# Altium PCB base_tiempo.PcbDoc (part 2 of 3)
Units mil, origin at the board's own origin, x right, y up, seen from the top; angles counter-clockwise.
Board outline 9832.52 x 6640 mil, 2 copper layers (Top Layer, Bottom Layer); 185 components, 479 nets, 1064 pads, 206 vias.
Unrouted connection lines stored in the file: 3.
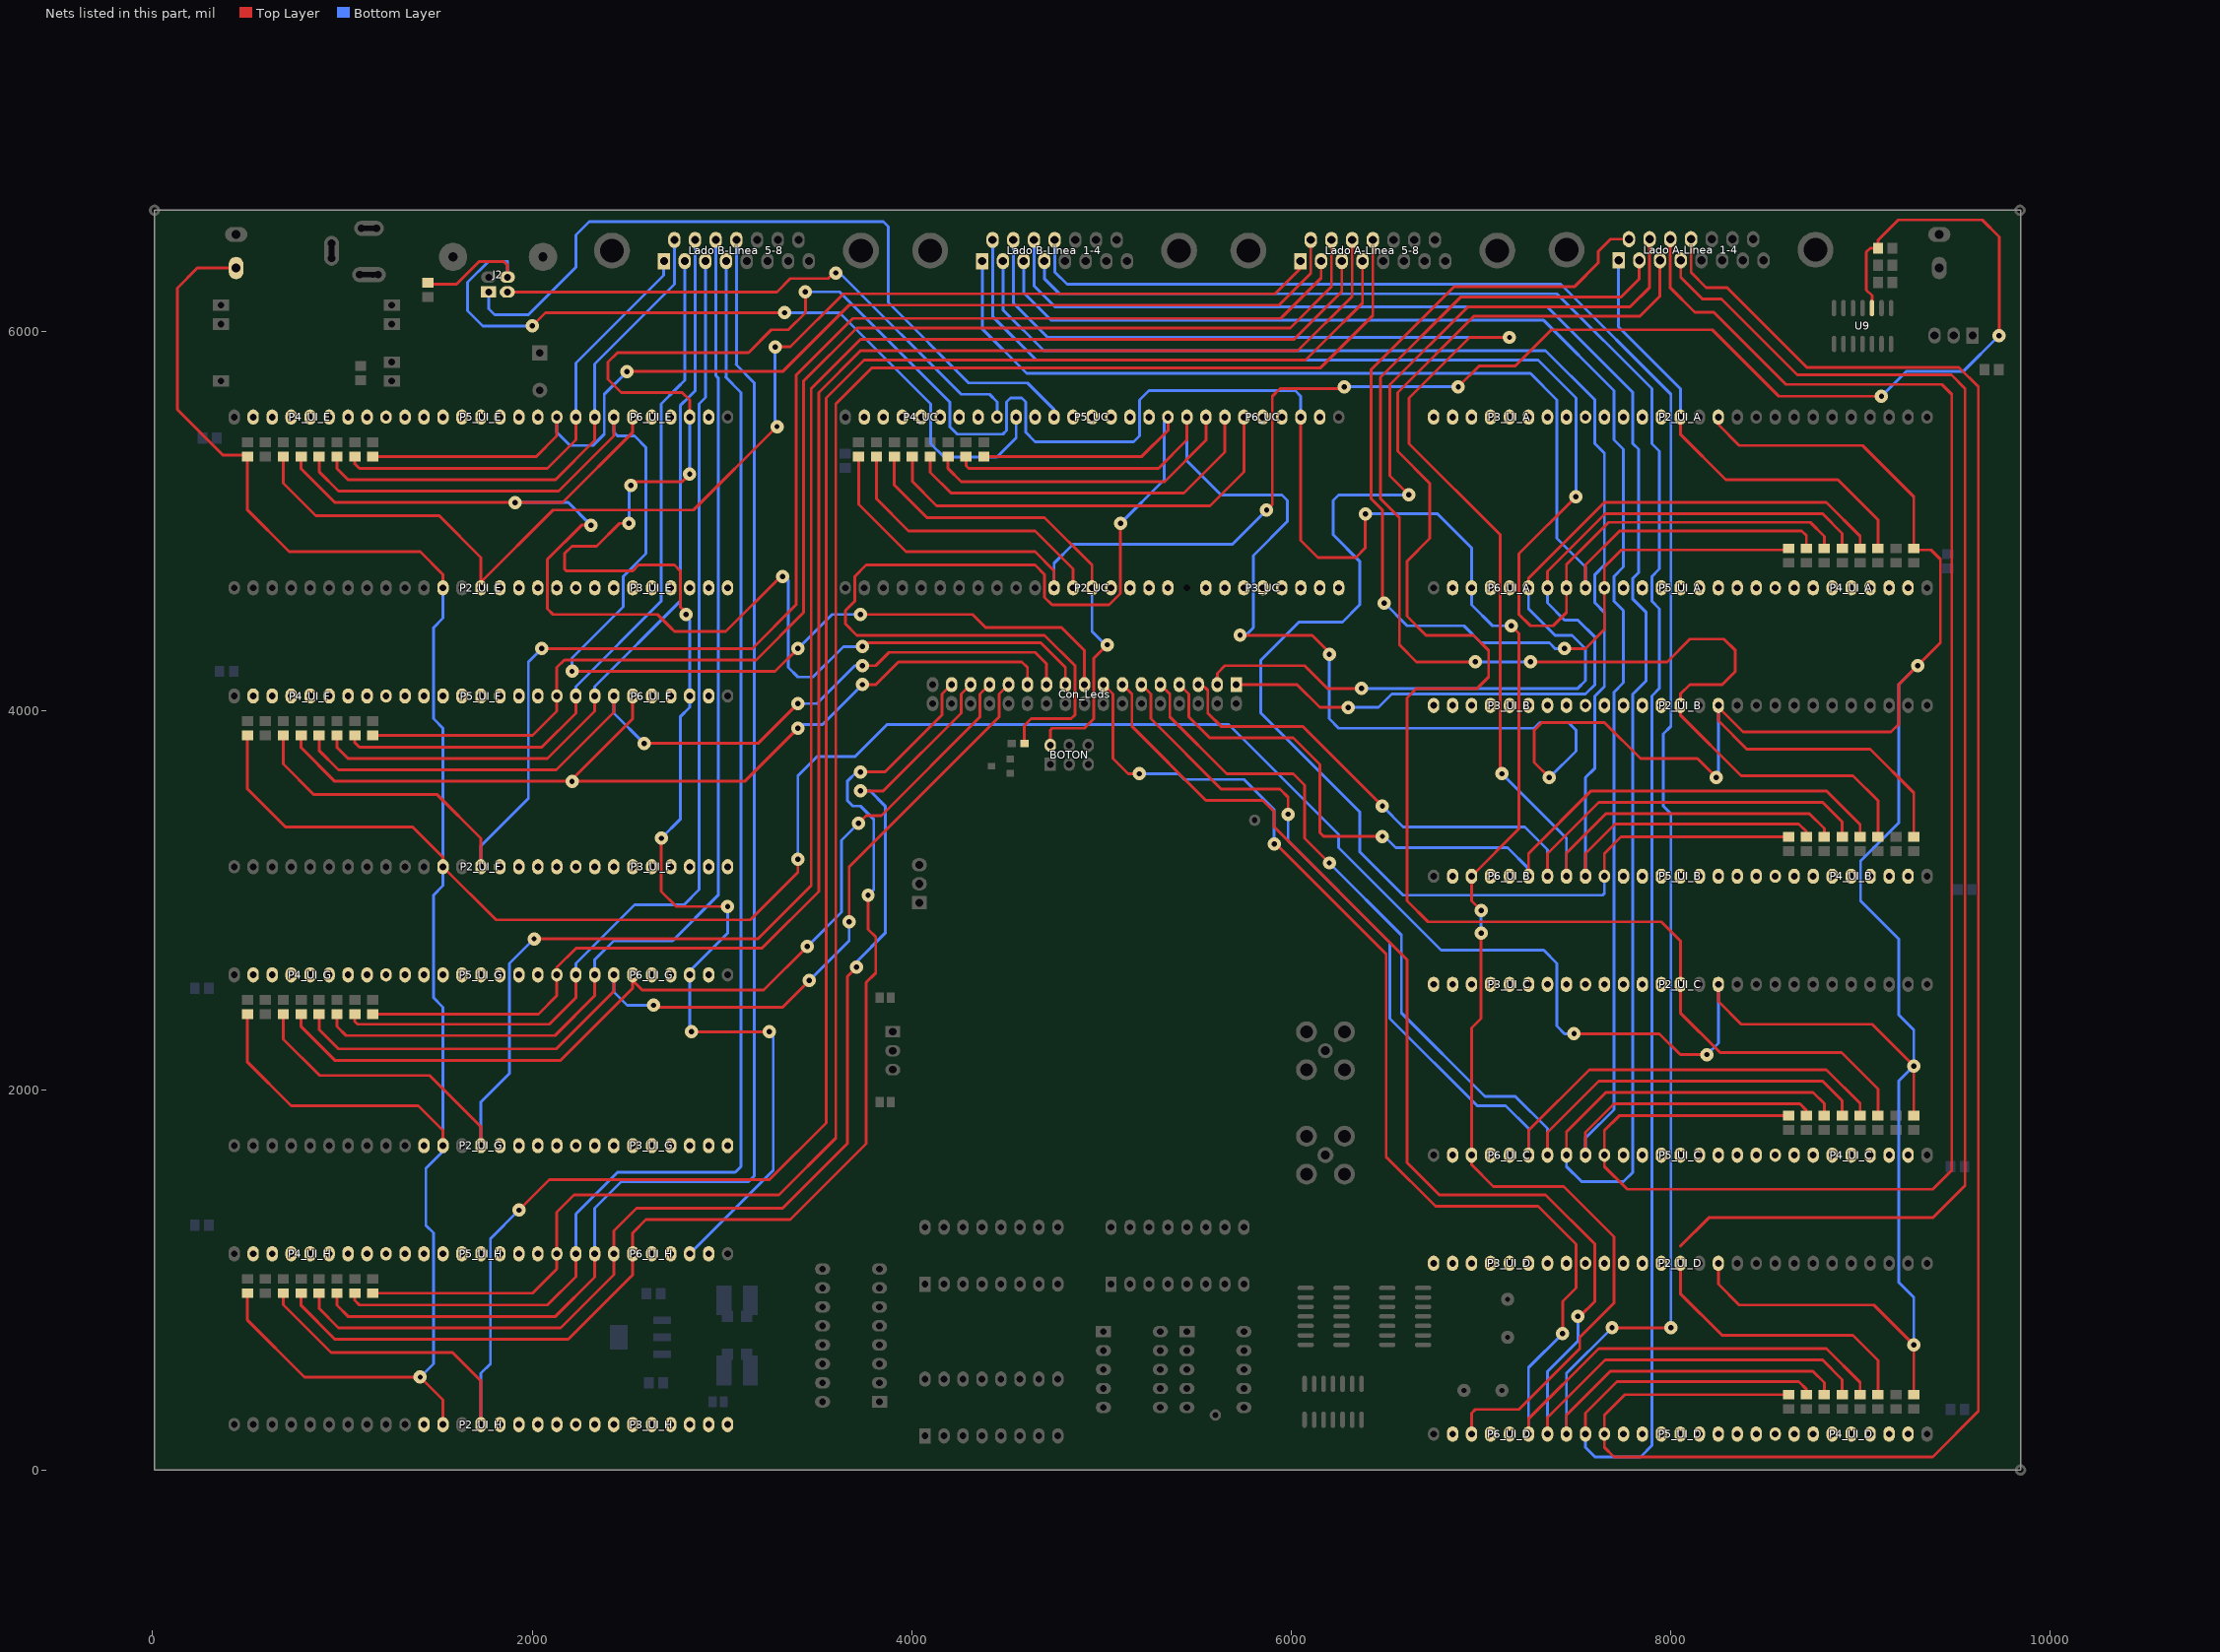
[diagram p2: the nets of this part, all layers, seen from the top]

## Via types
v1: diameter 70, hole 28, Top Layer to Bottom Layer, 157 vias
v2: diameter 60, hole 28, Top Layer to Bottom Layer, 46 vias
v3: diameter 65, hole 28, Top Layer to Bottom Layer, 2 vias
v4: diameter 50, hole 28, Top Layer to Bottom Layer, 1 vias

## Nets (pads, with @x,y where several pads share a name; then routed paths per layer and width w, separated by ;. In a path a pad name is that pad's centre, name@x,y a point inside that pad or via, vN(x,y) a via of type N, cw(c..) or ccw(c..) an arc to the next point about the centre after c; other vN are vias at no path point) (continued)
11_UI_G: P2_UI_G.2
11_UI_H: P2_UI_H.2
12_UC: P2_UC.3 R1_UC.1 r10.2 U9.3 | length 9408.1
  Top Layer w15: R1_UC.1@3719.58,5341.71 3719.58,5089.11 3969.58,4839.11 4649.58,4839.11 4749.58,4739.11 P2_UC.3@4749.58,4649.11 ; v1(5869.58,5059.11) 5899.58,5089.11 5899.58,5659.11 5939.58,5699.11 6269.58,5699.11 v1(6279.58,5709.11) ; v1(6879.58,5709.11) 6989.58,5819.11 7179.58,5819.11 7369.58,6009.11 8217.89,6009.11 8567.89,5659.11 v1(9109.58,5659.11) ; U9.3@9059.58,6123.6 9059.58,6189.11 9029.58,6219.11 9029.58,6419.11 9049.58,6439.11 r10.2@9092.18,6439.11 9092.18,6481.71 9198.47,6588 9640.69,6588 9729.58,6499.11 v1(9729.58,5979.11)
  Bottom Layer w15: P2_UC.3@4749.58,4649.11 4749.58,4779.11 4749.69,4779.11 4849.69,4879.11 5689.58,4879.11 v1(5869.58,5059.11) ; v1(6279.58,5709.11) v1(6879.58,5709.11) ; v1(9109.58,5659.11) 9239.58,5789.11 9539.58,5789.11 v1(9729.58,5979.11)
12_UI_A: P2_UI_A.3 P2_UI_B.3 P2_UI_C.3 P2_UI_D.3 P2_UI_E.3 P2_UI_F.3 P2_UI_G.3 P2_UI_H.3 P6_UC.9 R1_UI_A.1 R1_UI_B.1 R1_UI_C.1 R1_UI_D.1 R1_UI_E.1 R1_UI_F.1 R1_UI_G.1 R1_UI_H.1 R5_UC.1 Start.2B | length 40260.7
  Top Layer w15: Start.2B@439.58,6334.62 235.09,6334.62 129.58,6229.11 129.58,5589.11 369.11,5349.58 491.71,5349.58 R1_UI_E.1@499.58,5341.71 499.58,5059.11 719.58,4839.11 1409.58,4839.11 1529.58,4719.11 P2_UI_E.3@1529.58,4649.11 ; R1_UI_H.1@499.58,931.71 499.58,789.11 799.58,489.11 v1(1409.58,489.11) 1529.58,369.11 P2_UI_H.3@1529.58,239.11 ; R1_UI_G.1@499.58,2401.71 499.58,2149.11 729.58,1919.11 1399.58,1919.11 1529.58,1789.11 P2_UI_G.3@1529.58,1709.11 ; R1_UI_F.1@499.58,3871.71 499.58,3589.11 699.58,3389.11 1369.58,3389.11 1529.58,3229.11 P2_UI_F.3@1529.58,3179.11 1809.58,2899.11 3149.58,2899.11 3399.58,3149.11 v1(3399.58,3219.11) ; R5_UC.1@4285.3,5341.71 4285.3,5293.4 4299.58,5279.11 5299.58,5279.11 5449.58,5429.11 P6_UC.9@5449.58,5549.11 ; v1(5729.58,4399.11) 6109.58,4399.11 6199.58,4309.11 v1(6199.58,4299.11) ; v1(7359.58,3649.11) 7279.58,3729.11 7279.58,3899.11 7319.58,3939.11 7649.58,3939.11 7839.58,3749.11 8139.58,3749.11 v1(8239.58,3649.11) ; v1(7489.58,2299.11) 7939.58,2299.11 8049.58,2189.11 v1(8189.58,2189.11) ; P2_UI_D.3@8249.58,1089.11 8249.58,979.11 8359.58,869.11 9069.58,869.11 v1(9279.58,659.11) R1_UI_D.1@9279.58,396.51 ; P2_UI_C.3@8249.58,2559.11 8249.58,2469.11 8369.58,2349.11 9059.58,2349.11 v1(9279.58,2129.11) R1_UI_C.1@9279.58,1866.51 ; P2_UI_B.3@8249.58,4029.11 P2_UI_B.3@8249.58,4019.11 ; P2_UI_A.3@8249.58,5549.11 8249.58,5509.11 8359.58,5399.11 9009.58,5399.11 9279.58,5129.11 R1_UI_A.1@9279.58,4856.51 9279.58,4848.64 9370.05,4848.64 9419.58,4799.11 9419.58,4359.11 v1(9299.58,4239.11) ; R1_UI_B.1@9279.58,3336.51 9279.58,3569.11 9049.58,3799.11 8399.58,3799.11 8249.58,3949.11 P2_UI_B.3@8249.58,4019.11 ; P2_UI_B.3@8249.58,4019.11 8379.58,3889.11 9159.58,3889.11 9199.58,3929.11 9199.58,4139.11 ; 9199.58,4139.11 v1(9299.58,4239.11) ; 9199.58,4139.11 v1(9299.58,4239.11)
  Bottom Layer w15: v1(1409.58,489.11) 1479.58,559.11 1479.58,1249.11 1439.58,1289.11 1439.58,1589.11 1529.58,1679.11 P2_UI_G.3@1529.58,1709.11 1529.58,2439.11 1479.58,2489.11 1479.58,3029.11 1529.58,3079.11 P2_UI_F.3@1529.58,3179.11 1529.58,3909.11 1479.58,3959.11 1479.58,4439.11 1529.58,4489.11 P2_UI_E.3@1529.58,4649.11 ; v1(3399.58,3219.11) 3399.58,3659.11 3500.95,3760.48 3700.95,3760.48 3869.58,3929.11 5669.58,3929.11 6249.58,3349.11 6249.58,3279.11 6789.58,2739.11 7329.58,2739.11 7399.58,2669.11 7399.58,2339.11 7439.58,2299.11 v1(7489.58,2299.11) ; P6_UC.9@5449.58,5549.11 5449.58,5319.11 5629.58,5139.11 5949.58,5139.11 5979.58,5109.11 5979.58,4999.11 5799.58,4819.11 5799.58,4439.11 5759.58,4399.11 v1(5729.58,4399.11) ; v1(6199.58,4299.11) 6199.58,3959.11 6249.58,3909.11 7279.58,3909.11 7309.58,3939.11 7459.58,3939.11 7499.58,3899.11 7499.58,3789.11 v1(7359.58,3649.11) ; v1(8189.58,2189.11) 8249.58,2249.11 P2_UI_C.3@8249.58,2559.11 ; v1(8239.58,3649.11) 8249.58,3659.11 P2_UI_B.3@8249.58,4029.11 ; v1(9279.58,659.11) 9279.58,909.11 9199.58,989.11 9199.58,2049.11 v1(9279.58,2129.11) 9279.58,2319.11 9199.58,2399.11 9199.58,2799.11 8999.58,2999.11 8999.58,3209.11 9199.58,3409.11 9199.58,4139.11 v1(9299.58,4239.11)
13_UC: P2_UC.4 R2_UC.1 | length 1511.9
  Top Layer w15: R2_UC.1@3813.87,5341.71 3813.87,5118.46 3983.22,4949.11 4649.58,4949.11 4849.58,4749.11 P2_UC.4@4849.58,4649.11
14_UC: BOTON.4 P2_UC.5 R3_UC.1 | length 2580
  Top Layer w15: R3_UC.1@3908.15,5341.71 3908.15,5190.54 4079.58,5019.11 4699.58,5019.11 4949.58,4769.11 P2_UC.5@4949.58,4649.11 ; BOTON.4@4729.58,3819.11 4729.58,3899.11 4739.58,3909.11 4909.58,3909.11 4959.58,3959.11 4959.58,4279.11 v1(5029.58,4349.11)
  Bottom Layer w15: P2_UC.5@4949.58,4649.11 4949.58,4419.11 5019.58,4349.11 v1(5029.58,4349.11)
14_UI_A: "Lado A-Linea  1-4.1" P2_UI_A.5 R3_UI_A.1 | length 2430.2
  Top Layer w15: P2_UI_A.5@8049.58,5549.11 8049.58,5459.11 8289.58,5219.11 8879.58,5219.11 9091.01,5007.68 R3_UI_A.1@9091.01,4856.51
  Bottom Layer w15: 7724.31,6375.02 7724.31,6024.39 8049.58,5699.11 P2_UI_A.5@8049.58,5549.11
14_UI_B: "Lado A-Linea  1-4.2" P2_UI_B.5 R3_UI_B.1 | length 6988.1
  Top Layer w15: v1(6969.58,4259.11) 6659.58,4259.11 6569.58,4349.11 6569.58,5019.11 6469.58,5119.11 6469.58,5759.11 6891.47,6181 7736,6181 7833.36,6278.36 7833.36,6375.02 ; v1(7259.58,4259.11) 7979.58,4259.11 8099.58,4379.11 8279.58,4379.11 8339.58,4319.11 8339.58,4209.11 8269.58,4139.11 8099.58,4139.11 8049.58,4089.11 P2_UI_B.5@8049.58,4029.11 8049.58,3979.11 8369.58,3659.11 8959.58,3659.11 9091.01,3527.68 R3_UI_B.1@9091.01,3336.51
  Bottom Layer w15: v1(6969.58,4259.11) v1(7259.58,4259.11)
14_UI_C: "Lado A-Linea  1-4.3" P2_UI_C.5 R3_UI_C.1 | length 8527.1
  Top Layer w15: 7942.42,6375.02 7942.42,6187.42 7836,6081 6961.47,6081 6559.58,5679.11 6559.58,5369.11 6729.58,5199.11 6729.58,4909.11 6609.58,4789.11 6609.58,4499.11 6709.58,4399.11 6959.58,4399.11 7039.58,4319.11 7039.58,4179.11 6979.58,4119.11 6659.58,4119.11 6609.58,4069.11 6609.58,2999.11 6719.58,2889.11 7949.58,2889.11 8049.58,2789.11 P2_UI_C.5@8049.58,2559.11 8049.58,2409.11 8259.58,2199.11 8899.58,2199.11 9091.01,2007.68 R3_UI_C.1@9091.01,1866.51
14_UI_D: "Lado A-Linea  1-4.4" P2_UI_D.5 R3_UI_D.1 | length 9199.1
  Top Layer w15: P2_UI_D.5@8049.58,1089.11 8049.58,929.11 8269.58,709.11 8959.58,709.11 9091.01,577.68 R3_UI_D.1@9091.01,396.51 R3_UI_D.1@9091.01,388.64 ; 8049.58,1179.11 8199.58,1329.11 9379.58,1329.11 9549.58,1499.11 9549.58,5699.11 9477.69,5771 8666,5771 8266,6171 8166,6171 8051.47,6285.53 8051.47,6375.02
14_UI_E: "Lado A-Linea  5-8.1" P2_UI_E.5 R3_UI_E.1 | length 6806.3
  Top Layer w15: R3_UI_E.1@688.15,5341.71 688.15,5200.54 859.58,5029.11 1509.58,5029.11 1729.58,4809.11 P2_UI_E.5@1729.58,4679.11 ; P2_UI_E.5@1729.58,4649.11 P2_UI_E.5@1729.58,4679.11 ; v1(3279.58,5919.11) 3359.58,5919.11 3639.58,6199.11 5914.11,6199.11 6047.64,6332.64 6047.64,6371.08 ; v1(3289.58,5499.11) 2849.58,5059.11 2109.58,5059.11 P2_UI_E.5@1729.58,4679.11
  Bottom Layer w15: v1(3279.58,5919.11) 3279.58,5509.11 v1(3289.58,5499.11)
14_UI_F: "Lado A-Linea  5-8.2" P2_UI_F.5 R3_UI_F.1 | length 8501.4
  Top Layer w15: R3_UI_F.1@688.15,3871.71 688.15,3720.54 849.58,3559.11 1499.58,3559.11 1729.58,3329.11 P2_UI_F.5@1729.58,3179.11 ; v1(2049.58,4329.11) 3159.58,4329.11 3389.58,4559.11 3389.58,5769.11 3689.58,6069.11 5944.11,6069.11 6156.7,6281.7 6156.7,6371.08
  Bottom Layer w15: P2_UI_F.5@1729.58,3179.11 1729.58,3289.11 1979.58,3539.11 1979.58,4259.11 v1(2049.58,4329.11)
14_UI_G: "Lado A-Linea  5-8.3" P2_UI_G.5 R3_UI_G.1 | length 10034.1
  Top Layer w15: R3_UI_G.1@688.15,2401.71 688.15,2270.54 879.58,2079.11 1459.58,2079.11 1729.58,1809.11 P2_UI_G.5@1729.58,1709.11 ; v1(2009.58,2799.11) 3189.58,2799.11 3469.58,3079.11 3469.58,5699.11 3729.58,5959.11 6014.11,5959.11 6265.75,6210.75 6265.75,6371.08
  Bottom Layer w15: P2_UI_G.5@1729.58,1709.11 1729.58,1939.11 1879.58,2089.11 1879.58,2669.11 v1(2009.58,2799.11)
14_UI_H: "Lado A-Linea  5-8.4" P2_UI_H.5 R3_UI_H.1 | length 11665.2
  Top Layer w15: R3_UI_H.1@688.15,931.71 688.15,870.54 939.58,619.11 1579.58,619.11 1729.58,469.11 P2_UI_H.5@1729.58,239.11 ; v1(1929.58,1369.11) 2089.58,1529.11 3249.58,1529.11 3549.58,1829.11 3549.58,5649.11 3749.58,5849.11 6074.11,5849.11 6166,5941 ; 6214.81,5989.81 6166,5941 ; 6374.81,6371.08 6374.81,6149.81 6166,5941
  Bottom Layer w15: P2_UI_H.5@1729.58,239.11 1729.58,509.11 1779.58,559.11 1779.58,1219.11 v1(1929.58,1369.11)
15_UC: P2_UC.6
15_UI_A: P2_UI_A.6
15_UI_B: P2_UI_B.6
15_UI_C: P2_UI_C.6
15_UI_D: P2_UI_D.6
15_UI_E: P2_UI_E.6
15_UI_F: P2_UI_F.6
15_UI_G: P2_UI_G.6
15_UI_H: P2_UI_H.6
16_UC: P2_UC.7
16_UI_A: P2_UI_A.7
16_UI_B: P2_UI_B.7
16_UI_C: P2_UI_C.7
16_UI_D: P2_UI_D.7
16_UI_E: P2_UI_E.7
16_UI_F: P2_UI_F.7
16_UI_G: P2_UI_G.7
16_UI_H: P2_UI_H.7
17_UC: P2_UC.8
17_UI_A: P2_UI_A.8
17_UI_B: P2_UI_B.8
17_UI_C: P2_UI_C.8
17_UI_D: P2_UI_D.8
17_UI_E: P2_UI_E.8
17_UI_F: P2_UI_F.8
17_UI_G: P2_UI_G.8
17_UI_H: P2_UI_H.8
18_UC: P2_UC.9
18_UI_A: P2_UI_A.9
18_UI_B: P2_UI_B.9
18_UI_C: P2_UI_C.9
18_UI_D: P2_UI_D.9
18_UI_E: P2_UI_E.9
18_UI_F: P2_UI_F.9
18_UI_G: P2_UI_G.9
18_UI_H: P2_UI_H.9
19_UC: P3_UC.1
19_UI_A: P3_UI_A.1 pad.5
19_UI_B: P3_UI_B.1 pad.11@7549.58,4029.11
19_UI_C: P3_UI_C.1 pad.17@7549.58,2559.11
19_UI_D: P3_UI_D.1 pad.28@7549.58,1089.11
19_UI_E: P3_UI_E.1 pad.49
19_UI_F: P3_UI_F.1 pad.43
19_UI_G: P3_UI_G.1 pad.35
19_UI_H: P3_UI_H.1 pad.29
20_UC: P3_UC.2
20_UI_A: P3_UI_A.2
20_UI_B: P3_UI_B.2
20_UI_C: P3_UI_C.2
20_UI_D: P3_UI_D.2
20_UI_E: P3_UI_E.2
20_UI_F: P3_UI_F.2
20_UI_G: P3_UI_G.2
20_UI_H: P3_UI_H.2
21_UC: P3_UC.3
21_UI_A: P3_UI_A.3
21_UI_B: P3_UI_B.3
21_UI_C: P3_UI_C.3
21_UI_D: P3_UI_D.3
21_UI_E: P3_UI_E.3
21_UI_F: P3_UI_F.3
21_UI_G: P3_UI_G.3
21_UI_H: P3_UI_H.3
22_UC: P3_UC.4
22_UI_A: P3_UI_A.4
22_UI_B: P3_UI_B.4
22_UI_C: P3_UI_C.4
22_UI_D: P3_UI_D.4
22_UI_E: P3_UI_E.4
22_UI_F: P3_UI_F.4
22_UI_G: P3_UI_G.4
22_UI_H: P3_UI_H.4
23_UC: P3_UC.5
23_UI_A: P3_UI_A.5
23_UI_B: P3_UI_B.5
23_UI_C: P3_UI_C.5
23_UI_D: P3_UI_D.5
23_UI_E: P3_UI_E.5
23_UI_F: P3_UI_F.5
23_UI_G: P3_UI_G.5
23_UI_H: P3_UI_H.5
24_UC: P3_UC.6
24_UI_A: P3_UI_A.6
24_UI_B: P3_UI_B.6
24_UI_C: P3_UI_C.6
24_UI_D: P3_UI_D.6
24_UI_E: P3_UI_E.6
24_UI_F: P3_UI_F.6
24_UI_G: P3_UI_G.6
24_UI_H: P3_UI_H.6
25_UC: P3_UC.7
25_UI_A: P3_UI_A.7
25_UI_B: P3_UI_B.7
25_UI_C: P3_UI_C.7
25_UI_D: P3_UI_D.7
25_UI_E: P3_UI_E.7
25_UI_F: P3_UI_F.7
25_UI_G: P3_UI_G.7
25_UI_H: P3_UI_H.7
26_UC: P3_UC.8
26_UI_A: P3_UI_A.8
26_UI_B: P3_UI_B.8
26_UI_C: P3_UI_C.8
26_UI_D: P3_UI_D.8
26_UI_E: P3_UI_E.8
26_UI_F: P3_UI_F.8
26_UI_G: P3_UI_G.8
26_UI_H: P3_UI_H.8
27_UC: P3_UC.9
27_UI_A: P3_UI_A.9
27_UI_B: P3_UI_B.9
27_UI_C: P3_UI_C.9
27_UI_D: P3_UI_D.9
27_UI_E: P3_UI_E.9
27_UI_F: P3_UI_F.9
27_UI_G: P3_UI_G.9
27_UI_H: P3_UI_H.9
29_UC: P4_UC.8
29_UI_A: P4_UI_A.8
29_UI_B: P4_UI_B.8
29_UI_C: P4_UI_C.8
29_UI_D: P4_UI_D.8
29_UI_E: P4_UI_E.8
29_UI_F: P4_UI_F.8
29_UI_G: P4_UI_G.8
29_UI_H: P4_UI_H.8
30_UC: P4_UC.7
30_UI_A: P4_UI_A.7
30_UI_B: P4_UI_B.7
30_UI_C: P4_UI_C.7
30_UI_D: P4_UI_D.7
30_UI_E: P4_UI_E.7
30_UI_F: P4_UI_F.7
30_UI_G: P4_UI_G.7
30_UI_H: P4_UI_H.7
31_UC: P4_UC.6
31_UI_A: P4_UI_A.6
31_UI_B: P4_UI_B.6
31_UI_C: P4_UI_C.6
31_UI_D: P4_UI_D.6
31_UI_E: P4_UI_E.6
31_UI_F: P4_UI_F.6
31_UI_G: P4_UI_G.6
31_UI_H: P4_UI_H.6
32_UC: P4_UC.5
32_UI_A: P4_UI_A.5
32_UI_B: P4_UI_B.5
32_UI_C: P4_UI_C.5
32_UI_D: P4_UI_D.5
32_UI_E: P4_UI_E.5
32_UI_F: P4_UI_F.5
32_UI_G: P4_UI_G.5
32_UI_H: P4_UI_H.5
33_UC: P4_UC.4
33_UI_A: P4_UI_A.4
33_UI_B: P4_UI_B.4
33_UI_C: P4_UI_C.4
33_UI_D: P4_UI_D.4
33_UI_E: P4_UI_E.4
33_UI_F: P4_UI_F.4
33_UI_G: P4_UI_G.4
33_UI_H: P4_UI_H.4
34_UC: P4_UC.3
34_UI_A: P4_UI_A.3
34_UI_B: P4_UI_B.3
34_UI_C: P4_UI_C.3
34_UI_D: P4_UI_D.3
34_UI_E: P4_UI_E.3
34_UI_F: P4_UI_F.3
34_UI_G: P4_UI_G.3
34_UI_H: P4_UI_H.3
35_UC: P4_UC.2
35_UI_A: P4_UI_A.2
35_UI_B: P4_UI_B.2
35_UI_C: P4_UI_C.2
35_UI_D: P4_UI_D.2
35_UI_E: P4_UI_E.2
35_UI_F: P4_UI_F.2
35_UI_G: P4_UI_G.2
35_UI_H: P4_UI_H.2
36_UC: J2.2 P4_UC.1 pad.0 | length 2984.3
  Top Layer w15: J2.2@1868.79,6208.17 3288.64,6208.17 3359.58,6279.11 3559.58,6279.11 3589.58,6309.11 v1(3599.58,6309.11)
  Bottom Layer w15: v1(3599.58,6309.11) 3619.58,6309.11 4259.58,5669.11 4409.58,5669.11 4449.58,5629.11 pad.0@4449.58,5549.11
36_UI_A: P4_UI_A.1 pad.8
36_UI_B: P4_UI_B.1 pad.14@8549.58,3129.11
36_UI_C: P4_UI_C.1 pad.20@8549.58,1659.11
36_UI_D: P4_UI_D.1 pad.25@8549.58,189.11
36_UI_E: P4_UI_E.1 pad.52
36_UI_F: P4_UI_F.1 pad.46
36_UI_G: P4_UI_G.1 pad.38
36_UI_H: P4_UI_H.1 pad.32
37_UC: J2.3 P5_UC.9 R_PU_USB.1 | length 4569.5
  Top Layer w15: R_PU_USB.1@1449.58,6248.64 1599.11,6248.64 1719.58,6369.11 1849.58,6369.11 1868.79,6349.9 J2.3@1868.79,6286.91 ; v1(1999.58,6029.11) 2069.58,6099.11 v1(3329.58,6099.11)
  Bottom Layer w15: J2.3@1868.79,6286.91 1868.79,6369.9 1770.37,6369.9 1659.58,6259.11 1659.58,6109.11 1739.58,6029.11 v1(1999.58,6029.11) ; v1(3329.58,6099.11) 3619.58,6099.11 4099.58,5619.11 4099.58,5409.11 4169.58,5339.11 4449.58,5339.11 4549.58,5439.11 P5_UC.9@4549.58,5549.11
37_UI_A: P5_UI_A.9
37_UI_B: P5_UI_B.9
37_UI_C: P5_UI_C.9
37_UI_D: P5_UI_D.9
37_UI_E: P5_UI_E.9
37_UI_F: P5_UI_F.9
37_UI_G: P5_UI_G.9
37_UI_H: P5_UI_H.9
38_UC: P5_UC.8
38_UI_A: P5_UI_A.8
38_UI_B: P5_UI_B.8
38_UI_C: P5_UI_C.8
38_UI_D: P5_UI_D.8
38_UI_E: P5_UI_E.8
38_UI_F: P5_UI_F.8
38_UI_G: P5_UI_G.8
38_UI_H: P5_UI_H.8
39_UC: J2.1 P5_UC.7 | length 4067.2
  Bottom Layer w15: J2.1@1770.37,6208.17 1770.37,6119.9 1801.16,6089.11 1979.58,6089.11 2229.58,6339.11 2229.58,6509.11 2299.58,6579.11 3849.58,6579.11 3876,6552.69 3876,6152.69 4299.58,5729.11 4609.58,5729.11 4749.58,5589.11 P5_UC.7@4749.58,5549.11
39_UI_A: P5_UI_A.7
39_UI_B: P5_UI_B.7
39_UI_C: P5_UI_C.7
39_UI_D: P5_UI_D.7
39_UI_E: P5_UI_E.7
39_UI_F: P5_UI_F.7
39_UI_G: P5_UI_G.7
39_UI_H: P5_UI_H.7
40_UC: P5_UC.6
40_UI_A: P5_UI_A.6
40_UI_B: P5_UI_B.6
40_UI_C: P5_UI_C.6
40_UI_D: P5_UI_D.6
40_UI_E: P5_UI_E.6
40_UI_F: P5_UI_F.6
40_UI_G: P5_UI_G.6
40_UI_H: P5_UI_H.6
41_UC: P5_UC.5
41_UI_A: P5_UI_A.5
41_UI_B: P5_UI_B.5
41_UI_C: P5_UI_C.5
41_UI_D: P5_UI_D.5
41_UI_E: P5_UI_E.5
41_UI_F: P5_UI_F.5
41_UI_G: P5_UI_G.5
41_UI_H: P5_UI_H.5
42_UC: P5_UC.4
42_UI_A: P5_UI_A.4
42_UI_B: P5_UI_B.4
42_UI_C: P5_UI_C.4
42_UI_D: P5_UI_D.4
42_UI_E: P5_UI_E.4
42_UI_F: P5_UI_F.4
42_UI_G: P5_UI_G.4
42_UI_H: P5_UI_H.4
43_UC: P5_UC.3
43_UI_A: P5_UI_A.3
43_UI_B: P5_UI_B.3
43_UI_C: P5_UI_C.3
43_UI_D: P5_UI_D.3
43_UI_E: P5_UI_E.3
43_UI_F: P5_UI_F.3
43_UI_G: P5_UI_G.3
43_UI_H: P5_UI_H.3
44_UC: P5_UC.2
44_UI_A: P5_UI_A.2
44_UI_B: P5_UI_B.2
44_UI_C: P5_UI_C.2
44_UI_D: P5_UI_D.2
44_UI_E: P5_UI_E.2
44_UI_F: P5_UI_F.2
44_UI_G: P5_UI_G.2
44_UI_H: P5_UI_H.2
45_UC: P5_UC.1 pad.3@5349.58,5549.11 R4_UC.1 R_BOTON.2 | length 5952.7
  Top Layer w15: R4_UC.1@4379.58,5341.71 5212.18,5341.71 5349.58,5479.11 pad.3@5349.58,5549.11 ; R_BOTON.2@4593.05,3829.11 4593.05,3922.57 4629.58,3959.11 4839.58,3959.11 4859.58,3979.11 4859.58,4239.11 4699.58,4399.11 3709.58,4399.11 3649.58,4459.11 3649.58,4529.11 3699.58,4579.11 3699.58,4709.11 3759.58,4769.11 4649.58,4769.11 4699.58,4719.11 4699.58,4599.11 4739.58,4559.11 5039.58,4559.11 5099.53,4619.06 ; 5099.58,4619.01 v1(5099.58,4989.11)
  Bottom Layer w15: v1(5099.58,4989.11) 5329.58,5219.11 5329.58,5529.11 pad.3@5349.58,5549.11
45_UI_A: "Lado A-Linea  1-4.9" P5_UI_A.1 pad.9@7649.58,4649.11 R4_UI_A.1 | length 5584.5
  Top Layer w15: v1(6489.58,4569.11) 6479.58,4579.11 6479.58,5059.11 6419.58,5119.11 6419.58,5799.11 6856,6235.53 7490.53,6235.53 7616,6361 7616,6421 7681.83,6486.83 7778.83,6486.83 ; v1(7439.58,4329.11) 7449.58,4339.11 7459.58,4329.11 7549.58,4329.11 7649.58,4429.11 pad.9@7649.58,4649.11 7649.58,4759.11 7739.11,4848.64 R4_UI_A.1@8619.58,4848.64
  Bottom Layer w15: v1(6489.58,4569.11) 6609.58,4449.11 6909.58,4449.11 6999.58,4359.11 7359.58,4359.11 7389.58,4329.11 v1(7439.58,4329.11)
45_UI_B: "Lado A-Linea  1-4.10" P5_UI_B.1 pad.15@7649.58,3129.11 R4_UI_B.1 | length 7948
  Top Layer w15: v1(6619.58,5139.11) 6519.58,5239.11 6519.58,5719.11 6931.47,6131 7786,6131 7887.89,6232.89 7887.89,6486.83 ; pad.15@7649.58,3129.11 7649.58,3249.11 7736.98,3336.51 R4_UI_B.1@8619.58,3336.51
  Bottom Layer w15: v1(6619.58,5139.11) 6249.58,5139.11 6219.58,5109.11 6219.58,4929.11 6359.58,4789.11 6359.58,4559.11 6269.58,4469.11 6039.58,4469.11 5839.58,4269.11 5839.58,3989.11 6359.58,3469.11 6359.58,3259.11 6589.58,3029.11 7639.58,3029.11 7649.58,3039.11 pad.15@7649.58,3129.11
45_UI_C: "Lado A-Linea  1-4.11" P5_UI_C.1 pad.21@7649.58,1659.11 R4_UI_C.1 | length 9174.9
  Top Layer w15: 7996.94,6486.83 7996.94,6230.06 8126,6101 8226,6101 8606,5721 9427.69,5721 9479.58,5669.11 9479.58,1579.11 9379.58,1479.11 7769.58,1479.11 7649.58,1599.11 pad.21@7649.58,1659.11 7649.58,1789.11 7726.98,1866.51 R4_UI_C.1@8619.58,1866.51
45_UI_D: "Lado A-Linea  1-4.12" P5_UI_D.1 pad.24@7649.58,189.11 R4_UI_D.1 | length 10613.3
  Top Layer w15: 8106,6486.83 8106,6311 8186,6231 8296,6231 8716,5811 9517.69,5811 9619.58,5709.11 9619.58,309.11 9379.58,69.11 7699.58,69.11 7649.58,119.11 pad.24@7649.58,189.11 7649.58,289.11 7756.98,396.51 R4_UI_D.1@8619.58,396.51
45_UI_E: "Lado A-Linea  5-8.9" P5_UI_E.1 pad.51 R4_UI_E.1 | length 5870.9
  Top Layer w15: R4_UI_E.1@1159.58,5341.71 2022.18,5341.71 2129.58,5449.11 pad.51@2129.58,5549.11 ; v1(2499.58,5789.11) 3319.58,5789.11 3669.58,6139.11 5934.11,6139.11 6102.17,6307.17 6102.17,6482.89
  Bottom Layer w15: pad.51@2129.58,5549.11 2129.58,5469.11 2199.58,5399.11 2319.58,5399.11 2379.58,5459.11 2379.58,5669.11 v1(2499.58,5789.11)
45_UI_F: "Lado A-Linea  5-8.10" P5_UI_F.1 pad.44 R4_UI_F.1 | length 7127.1
  Top Layer w15: R4_UI_F.1@1159.58,3871.71 2002.18,3871.71 2129.58,3999.11 pad.44@2129.58,4079.11 2129.58,4229.11 2169.58,4269.11 3179.58,4269.11 3429.58,4519.11 3429.58,5739.11 3709.58,6019.11 5994.11,6019.11 6211.22,6236.22 6211.22,6482.89
45_UI_G: "Lado A-Linea  5-8.11" P5_UI_G.1 pad.39 R4_UI_G.1 | length 8654
  Top Layer w15: R4_UI_G.1@1159.58,2401.71 2032.18,2401.71 2129.58,2499.11 pad.39@2129.58,2609.11 2129.58,2649.11 2229.58,2749.11 3209.58,2749.11 3509.58,3049.11 3509.58,5679.11 3729.58,5899.11 6034.11,5899.11 6320.28,6185.28 6320.28,6482.89
45_UI_H: "Lado A-Linea  5-8.12" P5_UI_H.1 pad.33 R4_UI_H.1 | length 10245.3
  Top Layer w15: R4_UI_H.1@1159.58,931.71 2002.18,931.71 2129.58,1059.11 pad.33@2129.58,1139.11 2129.58,1359.11 2219.58,1449.11 3299.58,1449.11 3599.58,1749.11 3599.58,5619.11 3789.58,5809.11 6154.11,5809.11 6429.33,6084.33 6429.33,6482.89
46_UI_A: "Lado B-Linea  1-4.1" P6_UI_A.9 R5_UI_A.1 | length 6190.5
  Top Layer w15: P6_UI_A.9@7549.58,4649.11 7549.58,4769.11 7729.58,4949.11 8689.58,4949.11 8713.87,4924.82 ; R5_UI_A.1@8713.87,4848.64 8713.87,4924.82 ; R5_UI_A.1@8713.87,4848.64 8713.87,4924.82 ; R5_UI_A.1@8713.87,4848.64 8713.87,4924.82
  Bottom Layer w15: 4370.97,6371.08 4370.97,6014.14 4606,5779.11 7259.58,5779.11 7399.58,5639.11 7399.58,4909.11 7549.58,4759.11 P6_UI_A.9@7549.58,4649.11
46_UI_B: "Lado B-Linea  1-4.2" P6_UI_B.9 R5_UI_B.1 | length 7579.9
  Top Layer w15: P6_UI_B.9@7549.58,3129.11 7549.58,3249.11 7705.3,3404.82 8673.87,3404.82 8713.87,3364.82 R5_UI_B.1@8713.87,3336.51
  Bottom Layer w15: 4480.03,6371.08 4480.03,6115.08 4696,5899.11 7339.58,5899.11 7599.58,5639.11 7599.58,5409.11 7649.58,5359.11 7649.58,4769.11 7599.58,4719.11 7599.58,4569.11 7649.58,4519.11 7649.58,4129.11 7599.58,4079.11 7599.58,3699.11 7549.58,3649.11 P6_UI_B.9@7549.58,3129.11
46_UI_C: "Lado B-Linea  1-4.3" P6_UI_C.9 R5_UI_C.1 | length 9053.6
  Top Layer w15: P6_UI_C.9@7549.58,1659.11 7549.58,1779.11 7699.58,1929.11 8679.58,1929.11 8713.87,1894.82 R5_UI_C.1@8713.87,1866.51
  Bottom Layer w15: 4589.08,6371.08 4589.08,6206.03 4736,6059.11 7329.58,6059.11 7699.58,5689.11 7699.58,5429.11 7749.58,5379.11 7749.58,4759.11 7699.58,4709.11 7699.58,4579.11 7749.58,4529.11 7749.58,4149.11 7699.58,4099.11 7699.58,1899.11 7549.58,1749.11 P6_UI_C.9@7549.58,1659.11
46_UI_D: "Lado B-Linea  1-4.4" P6_UI_D.9 R5_UI_D.1 | length 11023.4
  Top Layer w15: P6_UI_D.9@7549.58,189.11 7549.58,299.11 7715.3,464.82 8673.87,464.82 8713.87,424.82 R5_UI_D.1@8713.87,396.51
  Bottom Layer w15: 4698.14,6371.08 4698.14,6278.86 4777.89,6199.11 7399.58,6199.11 7899.58,5699.11 7899.58,5409.11 7939.58,5369.11 7939.58,4749.11 7899.58,4709.11 7899.58,4579.11 7939.58,4539.11 7939.58,4119.11 7899.58,4079.11 7899.58,129.11 7839.58,69.11 7599.58,69.11 7549.58,119.11 P6_UI_D.9@7549.58,189.11
46_UI_E: "Lado B-Linea  5-8.1" P6_UI_E.9 R5_UI_E.1 | length 2406.2
  Top Layer w15: R5_UI_E.1@1065.3,5341.71 1065.3,5303.4 1089.58,5279.11 2079.58,5279.11 2229.58,5429.11 P6_UI_E.9@2229.58,5549.11
  Bottom Layer w15: P6_UI_E.9@2229.58,5549.11 2229.58,5834.58 2691.47,6296.47 2691.47,6369.19
46_UI_F: "Lado B-Linea  5-8.2" P6_UI_F.9 R5_UI_F.1 | length 3958.9
  Top Layer w15: R5_UI_F.1@1065.3,3871.71 1065.3,3833.4 1089.58,3809.11 2049.58,3809.11 2229.58,3989.11 P6_UI_F.9@2229.58,4079.11
  Bottom Layer w15: P6_UI_F.9@2229.58,4079.11 2229.58,4129.11 2679.58,4579.11 2679.58,5619.11 2763.74,5703.26 ; 2800.53,5740.05 2763.74,5703.26 ; 2803.36,6371.08 2803.36,5742.89 2763.74,5703.26
46_UI_G: "Lado B-Linea  5-8.3" P6_UI_G.9 R5_UI_G.1 | length 5626
  Top Layer w15: R5_UI_G.1@1065.3,2401.71 1065.3,2363.4 1079.58,2349.11 2089.58,2349.11 2229.58,2489.11 P6_UI_G.9@2229.58,2609.11
  Bottom Layer w15: P6_UI_G.9@2229.58,2609.11 2229.58,2669.11 2539.58,2979.11 2799.58,2979.11 2879.58,3059.11 2879.58,5619.11 ; 2909.58,5649.11 2879.58,5619.11 ; 2912.42,6371.08 2912.42,5651.94 2879.58,5619.11
46_UI_H: "Lado B-Linea  5-8.4" P6_UI_H.9 R5_UI_H.1 | length 7385
  Top Layer w15: R5_UI_H.1@1065.3,931.71 1065.3,893.4 1089.58,869.11 2079.58,869.11 2229.58,1019.11 P6_UI_H.9@2229.58,1139.11
  Bottom Layer w15: P6_UI_H.9@2229.58,1139.11 2229.58,1349.11 2449.58,1569.11 3069.58,1569.11 3099.58,1599.11 3099.58,5679.11 3018.64,5760.06 3021.47,5762.89 3021.47,6371.08
47_UC: P6_UC.8 R6_UC.1 | length 1663.7
  Top Layer w15: R6_UC.1@4191.01,5341.71 4191.01,5277.68 4259.58,5209.11 5332.3,5209.11 5549.58,5426.39 P6_UC.8@5549.58,5549.11
47_UI_A: "Lado B-Linea  1-4.9" P6_UI_A.8 R6_UI_A.1 | length 7173.3
  Top Layer w15: v1(7499.58,5129.11) 7199.58,4829.11 7199.58,4509.11 7259.58,4449.11 7379.58,4449.11 7449.58,4519.11 P6_UI_A.8@7449.58,4649.11 7449.58,4771.83 7671.86,4994.11 8734.58,4994.11 8808.15,4920.54 ; R6_UI_A.1@8808.15,4848.64 8808.15,4920.54 ; R6_UI_A.1@8808.15,4848.64 8808.15,4920.54 ; R6_UI_A.1@8808.15,4848.64 8808.15,4920.54
  Bottom Layer w15: 4425.5,6482.89 4425.5,6079.61 4656,5849.11 7299.58,5849.11 7499.58,5649.11 v1(7499.58,5129.11)
47_UI_B: "Lado B-Linea  1-4.10" P6_UI_B.8 R6_UI_B.1 | length 8192.6
  Top Layer w15: v1(7109.58,3669.11) 7099.58,3679.11 7099.58,4929.11 6619.58,5409.11 6619.58,5649.11 6939.58,5969.11 v1(7149.58,5969.11) ; P6_UI_B.8@7449.58,3129.11 7449.58,3251.83 7656.86,3459.11 8729.58,3459.11 8808.15,3380.54 R6_UI_B.1@8808.15,3336.51
  Bottom Layer w15: 4534.56,6482.89 4534.56,6150.55 4716,5969.11 v1(7149.58,5969.11) ; v1(7109.58,3669.11) 7449.58,3329.11 P6_UI_B.8@7449.58,3129.11
47_UI_C: "Lado B-Linea  1-4.11" P6_UI_C.8 R6_UI_C.1 | length 9942.4
  Top Layer w15: P6_UI_C.8@7449.58,1659.11 7449.58,1781.83 7656.86,1989.11 8749.58,1989.11 8808.15,1930.54 R6_UI_C.1@8808.15,1866.51
  Bottom Layer w15: 4643.61,6482.89 4643.61,6241.5 4756,6129.11 7349.58,6129.11 7799.58,5679.11 7799.58,5409.11 7829.58,5379.11 7829.58,4729.11 7799.58,4699.11 7799.58,4589.11 7869.58,4519.11 7869.58,4159.11 7799.58,4089.11 7799.58,1569.11 7749.58,1519.11 7529.58,1519.11 7449.58,1599.11 P6_UI_C.8@7449.58,1659.11
47_UI_D: "Lado B-Linea  1-4.12" P6_UI_D.8 R6_UI_D.1 | length 11247.4
  Top Layer w15: P6_UI_D.8@7449.58,189.11 7449.58,289.11 7679.58,519.11 8749.58,519.11 8808.15,460.54 R6_UI_D.1@8808.15,396.51 ; v1(7689.58,749.11) v1(7999.58,749.11)
  Bottom Layer w15: 4752.67,6482.89 4752.67,6314.33 4817.89,6249.11 7419.58,6249.11 7999.58,5669.11 7999.58,3919.11 7959.58,3879.11 7959.58,3499.11 7999.58,3459.11 v1(7999.58,749.11) ; P6_UI_D.8@7449.58,189.11 7449.58,509.11 v1(7689.58,749.11)
47_UI_E: "Lado B-Linea  5-8.9" P6_UI_E.8 R6_UI_E.1 | length 2763.5
  Top Layer w15: R6_UI_E.1@971.01,5341.71 971.01,5277.68 1029.58,5219.11 2122.3,5219.11 2329.58,5426.39 P6_UI_E.8@2329.58,5549.11
  Bottom Layer w15: P6_UI_E.8@2329.58,5549.11 2329.58,5829.11 2749.58,6249.11 2749.58,6482.14 2748.84,6482.89
47_UI_F: "Lado B-Linea  5-8.10" P6_UI_F.8 R6_UI_F.1 | length 4290.2
  Top Layer w15: R6_UI_F.1@971.01,3871.71 971.01,3807.68 1029.58,3749.11 2079.58,3749.11 2329.58,3999.11 P6_UI_F.8@2329.58,4079.11
  Bottom Layer w15: P6_UI_F.8@2329.58,4079.11 2329.58,4129.11 2779.58,4579.11 2779.58,5609.11 2828.74,5658.26 ; 2855.05,5684.58 2828.74,5658.26 ; 2857.89,6482.89 2857.89,5687.42 2828.74,5658.26
47_UI_G: "Lado B-Linea  5-8.11" P6_UI_G.8 R6_UI_G.1 | length 5969.7
  Top Layer w15: R6_UI_G.1@971.01,2401.71 971.01,2337.68 1019.58,2289.11 2119.58,2289.11 2329.58,2499.11 P6_UI_G.8@2329.58,2609.11
  Bottom Layer w15: P6_UI_G.8@2329.58,2609.11 2329.58,2689.11 2429.58,2789.11 2739.89,2789.11 2979.58,3028.8 2979.58,5754.78 2966.94,5767.42 2966.94,6482.89
47_UI_H: "Lado B-Linea  5-8.12" P6_UI_H.8 R6_UI_H.1 | length 7780.7
  Top Layer w15: R6_UI_H.1@971.01,931.71 971.01,867.68 1029.58,809.11 2122.3,809.11 2329.58,1016.39 P6_UI_H.8@2329.58,1139.11
  Bottom Layer w15: P6_UI_H.8@2329.58,1139.11 2329.58,1379.11 2469.58,1519.11 3139.58,1519.11 3169.58,1549.11 3169.58,5729.11 3073.16,5825.53 3076,5828.36 3076,6482.89
48_UC: P6_UC.7 R7_UC.1 | length 1956.8
  Top Layer w15: R7_UC.1@4096.72,5341.71 4096.72,5258.28 4207,5148 5434,5148 5649.58,5363.58 P6_UC.7@5649.58,5549.11
48_UI_A: Con_Leds.1 P6_UI_A.7 R7_UI_A.1 | length 4714.4
  Top Layer w15: Con_Leds.1@5709.58,4139.11 6029.58,4139.11 6149.58,4019.11 v1(6299.58,4019.11) ; P6_UI_A.7@7349.58,4649.11 7349.58,4735.47 7653.22,5039.11 8799.58,5039.11 8902.44,4936.25 ; R7_UI_A.1@8902.44,4848.64 8902.44,4936.25 ; R7_UI_A.1@8902.44,4848.64 8902.44,4936.25 ; R7_UI_A.1@8902.44,4848.64 8902.44,4936.25
  Bottom Layer w15: v1(6299.58,4019.11) 6459.58,4019.11 6529.58,4089.11 7549.58,4089.11 7599.58,4139.11 7599.58,4389.11 7509.58,4479.11 7439.58,4479.11 7349.58,4569.11 P6_UI_A.7@7349.58,4649.11
48_UI_B: Con_Leds.5 P6_UI_B.7 R7_UI_B.1 | length 4317.7
  Top Layer w15: Con_Leds.5@5509.58,4139.11 5529.58,4139.11 5559.58,4109.11 5559.58,3989.11 5629.58,3919.11 6059.58,3919.11 v1(6479.58,3499.11) ; P6_UI_B.7@7349.58,3129.11 7349.58,3249.11 7619.58,3519.11 8799.58,3519.11 8902.44,3416.25 R7_UI_B.1@8902.44,3336.51
  Bottom Layer w15: v1(6479.58,3499.11) 6589.58,3389.11 7229.58,3389.11 7349.58,3269.11 P6_UI_B.7@7349.58,3129.11
48_UI_C: Con_Leds.9 P6_UI_C.7 R7_UI_C.1 | length 5530.8
  Top Layer w15: Con_Leds.9@5309.58,4139.11 5359.58,4089.11 5359.58,3969.11 5659.58,3669.11 6009.58,3669.11 6069.58,3609.11 6069.58,3329.11 v1(6199.58,3199.11) ; P6_UI_C.7@7349.58,1659.11 7349.58,1779.11 7619.58,2049.11 8799.58,2049.11 8902.44,1946.25 R7_UI_C.1@8902.44,1866.51
  Bottom Layer w15: v1(6199.58,3199.11) 6579.58,2819.11 6579.58,2409.11 7019.58,1969.11 7179.58,1969.11 7349.58,1799.11 P6_UI_C.7@7349.58,1659.11
48_UI_D: Con_Leds.13 P6_UI_D.7 R7_UI_D.1 | length 7481.9
  Top Layer w15: Con_Leds.13@5109.58,4139.11 5159.58,4089.11 5159.58,3919.11 5549.58,3529.11 5849.58,3529.11 5909.58,3469.11 5909.58,3389.11 6609.58,2689.11 6609.58,1619.11 6779.58,1449.11 7339.58,1449.11 7599.58,1189.11 7599.58,889.11 7519.58,809.11 v1(7509.58,809.11) ; P6_UI_D.7@7349.58,189.11 7349.58,275.47 7653.22,579.11 8799.58,579.11 8902.44,476.25 R7_UI_D.1@8902.44,396.51
  Bottom Layer w15: P6_UI_D.7@7349.58,189.11 7349.58,519.11 7509.58,679.11 v1(7509.58,809.11)
48_UI_E: Con_Leds.17 P6_UI_E.7 R7_UI_E.1 | length 6603
  Top Layer w15: R7_UI_E.1@876.72,5341.71 876.72,5261.97 979.58,5159.11 2139.58,5159.11 2429.58,5449.11 P6_UI_E.7@2429.58,5549.11 ; v1(2209.58,4209.11) 3279.58,4209.11 v1(3399.58,4329.11) ; v1(3729.58,4509.11) 4319.58,4509.11 4389.58,4439.11 4789.58,4439.11 4909.58,4319.11 Con_Leds.17@4909.58,4139.11
  Bottom Layer w15: v1(2209.58,4209.11) 2209.58,4279.11 2479.58,4549.11 2479.58,4709.11 2599.58,4829.11 2599.58,5389.11 2539.58,5449.11 2449.58,5449.11 2429.58,5469.11 P6_UI_E.7@2429.58,5549.11 ; v1(3399.58,4329.11) 3579.58,4509.11 v1(3729.58,4509.11)
48_UI_F: Con_Leds.21 P6_UI_F.7 R7_UI_F.1 | length 4657.3
  Top Layer w15: R7_UI_F.1@876.72,3871.71 876.72,3791.97 979.58,3689.11 2125.94,3689.11 2429.58,3992.75 P6_UI_F.7@2429.58,4079.11 ; v1(2589.58,3829.11) 3189.58,3829.11 v1(3399.58,4039.11) ; v1(3739.58,4239.11) 3809.58,4239.11 3879.58,4309.11 4649.58,4309.11 4709.58,4249.11 Con_Leds.21@4709.58,4139.11
  Bottom Layer w15: P6_UI_F.7@2429.58,4079.11 2429.58,3989.11 v1(2589.58,3829.11) ; v1(3399.58,4039.11) 3499.58,4039.11 3699.58,4239.11 v1(3739.58,4239.11)
48_UI_G: Con_Leds.25 P6_UI_G.7 R7_UI_G.1 | length 5093.4
  Top Layer w15: R7_UI_G.1@876.72,2401.71 876.72,2321.97 979.58,2219.11 2125.94,2219.11 2429.58,2522.75 P6_UI_G.7@2429.58,2609.11 ; v1(2639.58,2449.11) 2649.58,2439.11 3319.58,2439.11 v1(3459.58,2579.11) ; v1(3669.58,2889.11) 3669.58,3179.11 4459.58,3969.11 4459.58,4089.11 Con_Leds.25@4509.58,4139.11
  Bottom Layer w15: P6_UI_G.7@2429.58,2609.11 2429.58,2519.11 2499.58,2449.11 v1(2639.58,2449.11) ; v1(3459.58,2579.11) 3669.58,2789.11 v1(3669.58,2889.11)
48_UI_H: Con_Leds.29 P6_UI_H.7 R7_UI_H.1 | length 6338.2
  Top Layer w15: R7_UI_H.1@876.72,931.71 876.72,851.97 979.58,749.11 2149.58,749.11 2429.58,1029.11 P6_UI_H.7@2429.58,1139.11 2429.58,1259.11 2549.58,1379.11 3319.58,1379.11 3659.58,1719.11 3659.58,2599.11 v1(3709.58,2649.11) ; v1(3729.58,3579.11) 3849.58,3579.11 4259.58,3989.11 4259.58,4089.11 Con_Leds.29@4309.58,4139.11
  Bottom Layer w15: v1(3709.58,2649.11) 3709.58,2679.11 3859.58,2829.11 3859.58,3499.11 3779.58,3579.11 v1(3729.58,3579.11)
49_UC: P6_UC.6 R8_UC.1 | length 2294.6
  Top Layer w15: R8_UC.1@4002.44,5341.71 4002.44,5210.56 4131,5082 5572,5082 5749.58,5259.58 P6_UC.6@5749.58,5549.11
49_UI_A: Con_Leds.3 P6_UI_A.6 R8_UI_A.1 | length 5006
  Top Layer w15: Con_Leds.3@5609.58,4139.11 5609.58,4199.11 5649.58,4239.11 6069.58,4239.11 6189.58,4119.11 v1(6369.58,4119.11) ; P6_UI_A.6@7249.58,4649.11 7249.58,4699.11 7649.58,5099.11 8819.58,5099.11 8996.73,4921.97 ; R8_UI_A.1@8996.73,4848.64 8996.73,4921.97 ; R8_UI_A.1@8996.73,4848.64 8996.73,4921.97 ; R8_UI_A.1@8996.73,4848.64 8996.73,4921.97
  Bottom Layer w15: v1(6369.58,4119.11) 7509.58,4119.11 7549.58,4159.11 7549.58,4329.11 7479.58,4399.11 7389.58,4399.11 7249.58,4539.11 P6_UI_A.6@7249.58,4649.11
49_UI_B: Con_Leds.7 P6_UI_B.6 R8_UI_B.1 | length 4705.6
  Top Layer w15: Con_Leds.7@5409.58,4139.11 5459.58,4089.11 5459.58,3969.11 5569.58,3859.11 6009.58,3859.11 6149.58,3719.11 6149.58,3359.11 6169.58,3339.11 v1(6479.58,3339.11) ; P6_UI_B.6@7249.58,3129.11 7249.58,3249.11 7579.58,3579.11 8819.58,3579.11 8996.73,3401.97 R8_UI_B.1@8996.72,3336.51
  Bottom Layer w15: v1(6479.58,3339.11) 6489.58,3339.11 6549.58,3279.11 7139.58,3279.11 7249.58,3169.11 P6_UI_B.6@7249.58,3129.11
49_UI_C: Con_Leds.11 P6_UI_C.6 R8_UI_C.1 | length 5743
  Top Layer w15: Con_Leds.11@5209.58,4139.11 5259.58,4089.11 5259.58,3959.11 5629.58,3589.11 5939.58,3589.11 5982.79,3545.9 v1(5982.79,3455.9) ; P6_UI_C.6@7249.58,1659.11 7249.58,1789.11 7569.58,2109.11 8819.58,2109.11 8996.73,1931.97 R8_UI_C.1@8996.72,1866.51
  Bottom Layer w15: v1(5982.79,3455.9) 5982.79,3315.9 6519.58,2779.11 6519.58,2379.11 6979.58,1919.11 7129.58,1919.11 7249.58,1799.11 P6_UI_C.6@7249.58,1659.11
49_UI_D: Con_Leds.15 P6_UI_D.6 R8_UI_D.1 | length 7866.1
  Top Layer w15: Con_Leds.15@5009.58,4139.11 5059.58,4089.11 5059.58,3749.11 5139.58,3669.11 v1(5199.58,3669.11) ; v1(5909.58,3299.11) 5919.58,3299.11 6499.58,2719.11 6499.58,1649.11 6759.58,1389.11 7299.58,1389.11 7499.58,1189.11 7499.58,959.11 7429.58,889.11 v1(7429.58,719.11) ; P6_UI_D.6@7249.58,189.11 7249.58,269.11 7619.58,639.11 8819.58,639.11 8996.73,461.97 R8_UI_D.1@8996.72,396.51
  Bottom Layer w15: v1(5199.58,3669.11) 5406.53,3669.11 5436.53,3639.11 5749.58,3639.11 5909.58,3479.11 v1(5909.58,3299.11) ; P6_UI_D.6@7249.58,189.11 7249.58,539.11 v1(7429.58,719.11)
49_UI_E: Con_Leds.19 P6_UI_E.6 R8_UI_E.1 | length 6740.7
  Top Layer w15: R8_UI_E.1@782.44,5341.71 782.44,5276.25 959.58,5099.11 v1(1909.58,5099.11) 2159.58,5099.11 2529.58,5469.11 P6_UI_E.6@2529.58,5549.11 ; v1(2309.58,4979.11) 2259.58,4979.11 2079.58,4799.11 2079.58,4539.11 2109.58,4509.11 2659.58,4509.11 2729.58,4439.11 2749.58,4419.11 3019.58,4419.11 3309.58,4709.11 v1(3319.58,4709.11) ; v1(3739.58,4339.11) 3759.58,4359.11 4679.58,4359.11 4809.58,4229.11 Con_Leds.19@4809.58,4139.11
  Bottom Layer w15: v1(1909.58,5099.11) 2189.58,5099.11 v1(2309.58,4979.11) ; v1(3319.58,4709.11) 3329.58,4709.11 3349.58,4689.11 3349.58,4229.11 3399.58,4179.11 3479.58,4179.11 3639.58,4339.11 v1(3739.58,4339.11)
49_UI_F: Con_Leds.23 P6_UI_F.6 R8_UI_F.1 | length 4916
  Top Layer w15: R8_UI_F.1@782.44,3871.71 782.44,3806.25 959.58,3629.11 v1@2199.58,3629.11 ; P6_UI_F.6@2529.58,4079.11 2529.58,3959.11 v1@2199.58,3629.11 ; v1(3399.58,3909.11) 3119.58,3629.11 v1@2199.58,3629.11 ; v1(3739.58,4139.11) 3809.58,4139.11 3929.58,4259.11 4579.58,4259.11 4609.58,4229.11 Con_Leds.23@4609.58,4139.11
  Bottom Layer w15: v1(3399.58,3909.11) 3419.58,3929.11 3529.58,3929.11 v1(3739.58,4139.11)
  other v1: 2209.58,3629.11
49_UI_G: Con_Leds.27 P6_UI_G.6 R8_UI_G.1 | length 4973.9
  Top Layer w15: R8_UI_G.1@782.44,2401.71 782.44,2336.25 959.58,2159.11 2149.58,2159.11 2529.58,2539.11 P6_UI_G.6@2529.58,2579.11 ; P6_UI_G.6@2529.58,2609.11 P6_UI_G.6@2529.58,2579.11 ; v1(3449.58,2759.11) 3219.58,2529.11 2579.58,2529.11 P6_UI_G.6@2529.58,2579.11 ; v1(3719.58,3409.11) 3759.58,3449.11 3839.58,3449.11 4359.58,3969.11 4359.58,4089.11 Con_Leds.27@4409.58,4139.11
  Bottom Layer w15: v1(3449.58,2759.11) 3629.58,2939.11 3629.58,3319.11 v1(3719.58,3409.11)
49_UI_H: Con_Leds.31 P6_UI_H.6 R8_UI_H.1 | length 6538.3
  Top Layer w15: R8_UI_H.1@782.44,931.71 782.44,866.25 959.58,689.11 2189.58,689.11 2529.58,1029.11 P6_UI_H.6@2529.58,1139.11 2529.58,1249.11 2599.58,1319.11 3359.58,1319.11 3759.58,1719.11 3759.58,2569.11 3809.58,2619.11 3809.58,2809.11 3769.58,2849.11 v1(3769.58,3029.11) ; v1(3729.58,3679.11) 3859.58,3679.11 4159.58,3979.11 4159.58,4089.11 Con_Leds.31@4209.58,4139.11
  Bottom Layer w15: v1(3729.58,3679.11) 3709.58,3679.11 3659.58,3629.11 3659.58,3529.11 3689.58,3499.11 3729.58,3499.11 3799.58,3429.11 3799.58,3059.11 v1(3769.58,3029.11)
50_UC: P6_UC.5
50_UI_A: P6_UI_A.5
50_UI_B: P6_UI_B.5
50_UI_C: P6_UI_C.5
50_UI_D: P6_UI_D.5
50_UI_E: P6_UI_E.5
50_UI_F: P6_UI_F.5
50_UI_G: P6_UI_G.5
50_UI_H: P6_UI_H.5
51_UC: P6_UC.4
51_UI_A: P6_UI_A.4
51_UI_B: P6_UI_B.4
51_UI_C: P6_UI_C.4
51_UI_D: P6_UI_D.4
51_UI_E: P6_UI_E.4
51_UI_F: P6_UI_F.4
51_UI_G: P6_UI_G.4
51_UI_H: P6_UI_H.4
52_UC: P6_UC.3 P6_UI_A.3 P6_UI_B.3 P6_UI_C.3 P6_UI_D.3 P6_UI_E.3 P6_UI_F.3 P6_UI_G.3 P6_UI_H.3 | length 20061.4
  Top Layer w15: v1(2509.58,4989.11) 2459.58,4989.11 2339.58,4869.11 2209.58,4869.11 2169.58,4829.11 2169.58,4749.11 2179.58,4739.11 2529.58,4739.11 2559.58,4769.11 2749.58,4769.11 2779.58,4739.11 2779.58,4549.11 2809.58,4519.11 v1(2809.58,4509.11) ; v1(2519.58,5189.11) 2539.58,5209.11 2789.58,5209.11 v1(2829.58,5249.11) ; v1(2679.58,3329.11) 2679.58,3049.11 2759.58,2969.11 v1(3029.58,2969.11) ; P6_UI_E.3@2829.58,5549.11 2829.58,5639.11 2789.58,5679.11 2469.58,5679.11 2399.58,5749.11 2399.58,5839.11 2449.58,5889.11 3139.58,5889.11 3259.58,6009.11 3349.58,6009.11 3439.58,6099.11 v1(3439.58,6209.11) ; v1(2839.58,2309.11) v1(3249.58,2309.11) ; P6_UC.3@6049.58,5549.11 6049.58,4899.11 6139.58,4809.11 6339.58,4809.11 6389.58,4859.11 v1(6389.58,5039.11) ; P6_UI_D.3@6949.58,189.11 6949.58,299.11 6969.58,319.11 7199.58,319.11 7519.58,639.11 7519.58,699.11 7699.58,879.11 7699.58,1229.11 7434.58,1494.11 7064.58,1494.11 6949.58,1609.11 P6_UI_C.3@6949.58,1659.11 6949.58,2329.11 6999.58,2379.11 v1(6999.58,2829.11) ; v1(6999.58,2949.11) 6949.58,2999.11 P6_UI_B.3@6949.58,3129.11 7199.58,3379.11 7199.58,4409.11 v1(7159.58,4449.11)
  Bottom Layer w15: v1(2509.58,4989.11) 2509.58,5179.11 v1(2519.58,5189.11) ; v1(2679.58,3329.11) 2779.58,3429.11 2779.58,3969.11 2829.58,4019.11 P6_UI_F.3@2829.58,4079.11 2829.58,4479.11 2809.58,4499.11 v1(2809.58,4509.11) ; P6_UI_H.3@2829.58,1139.11 3269.58,1579.11 3269.58,2289.11 v1(3249.58,2309.11) ; v1(2829.58,5249.11) P6_UI_E.3@2829.58,5549.11 ; v1(2839.58,2309.11) 2829.58,2319.11 P6_UI_G.3@2829.58,2609.11 2829.58,2629.11 3029.58,2829.11 v1(3029.58,2969.11) ; v1(3439.58,6209.11) 3619.58,6209.11 4199.58,5629.11 4199.58,5499.11 4239.58,5459.11 4479.58,5459.11 4499.58,5479.11 4499.58,5629.11 4519.58,5649.11 4579.58,5649.11 4599.58,5629.11 4599.58,5469.11 4649.58,5419.11 5169.58,5419.11 5199.58,5449.11 5199.58,5639.11 5249.58,5689.11 6019.58,5689.11 6049.58,5659.11 P6_UC.3@6049.58,5549.11 ; v1(6389.58,5039.11) 6769.58,5039.11 6949.58,4859.11 P6_UI_A.3@6949.58,4649.11 6949.58,4559.11 7059.58,4449.11 v1(7159.58,4449.11) ; v1(6999.58,2829.11) v1(6999.58,2949.11)
53_UC: P6_UC.2
53_UI_A: P6_UI_A.2
53_UI_B: P6_UI_B.2
53_UI_C: P6_UI_C.2
53_UI_D: P6_UI_D.2
53_UI_E: P6_UI_E.2
53_UI_F: P6_UI_F.2
53_UI_G: P6_UI_G.2
53_UI_H: P6_UI_H.2